# Altium PCB 八进八出.PcbDoc
Units mm, origin at the board's own origin, x right, y up, seen from the top; angles counter-clockwise.
Board outline 122.4 x 87.4 mm, 2 copper layers (Top Layer, Bottom Layer); 150 components, 165 nets, 519 pads, 53 vias.
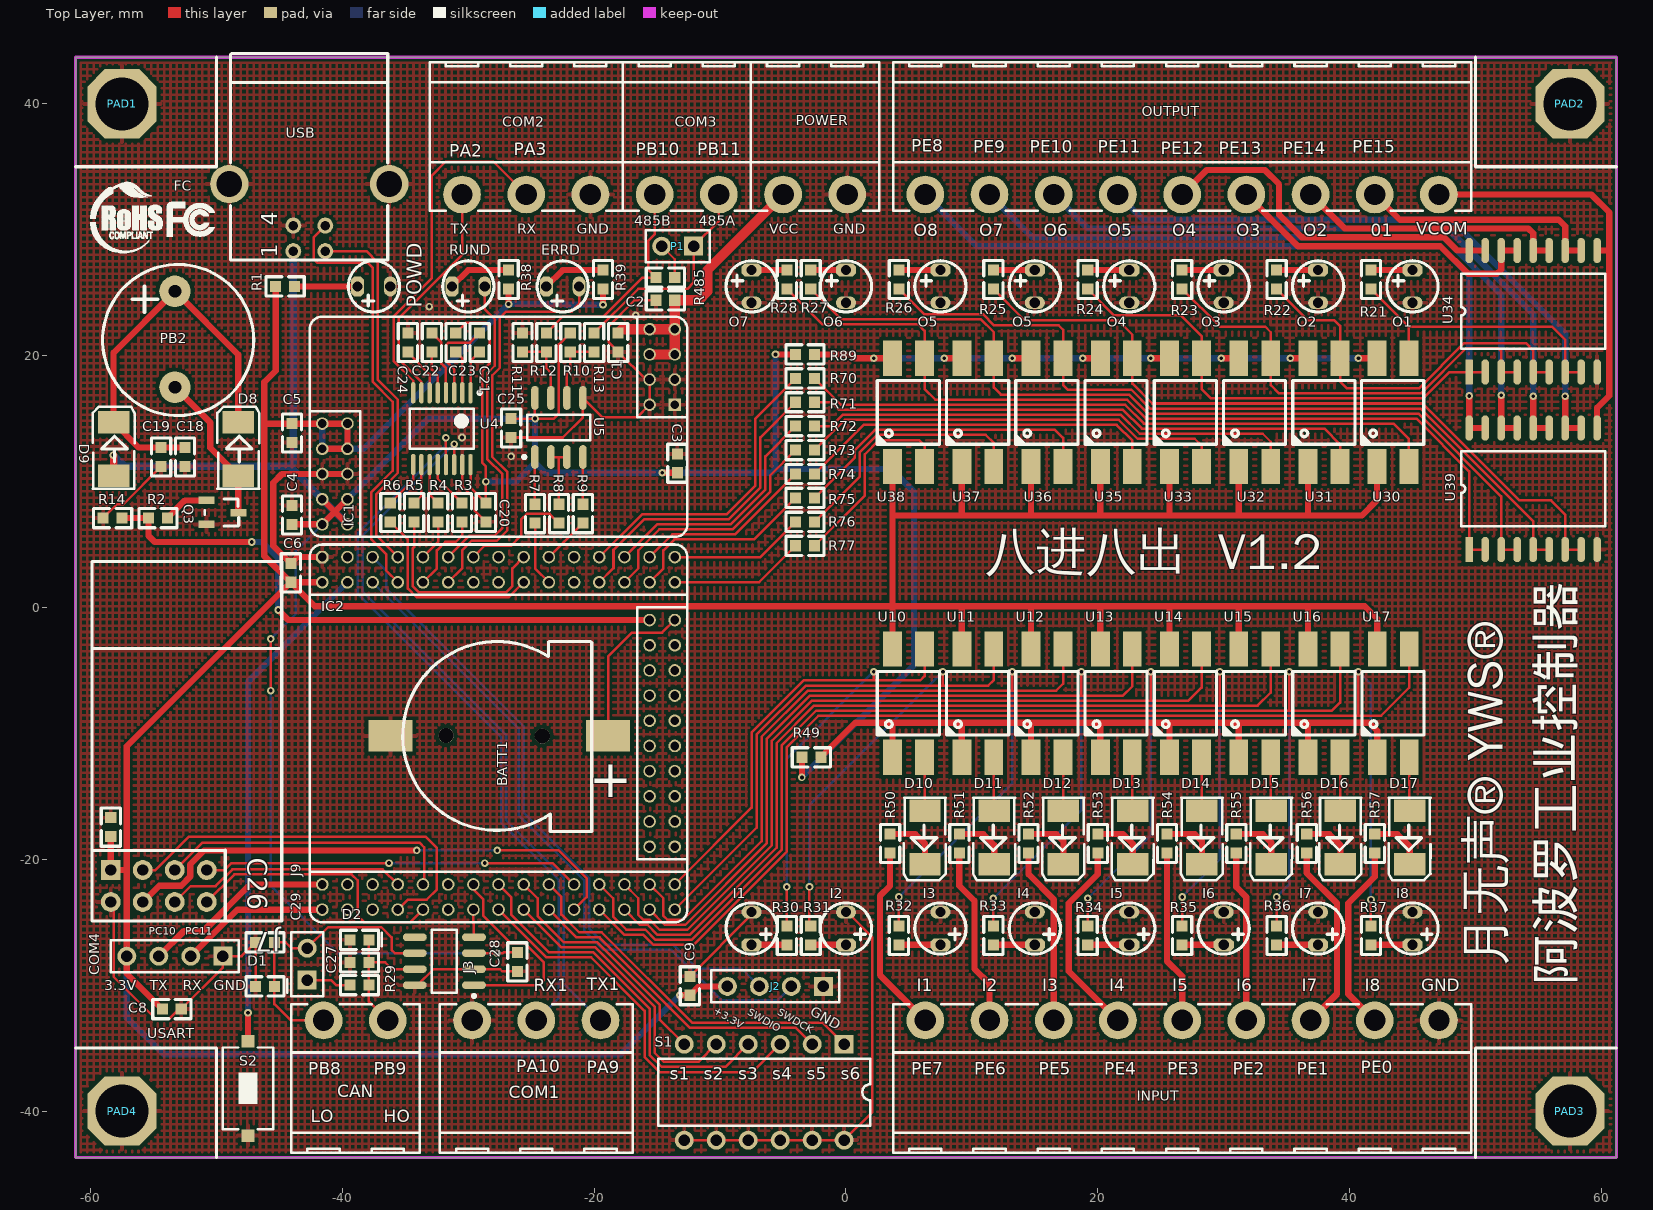
[diagram p0: Top Layer view]
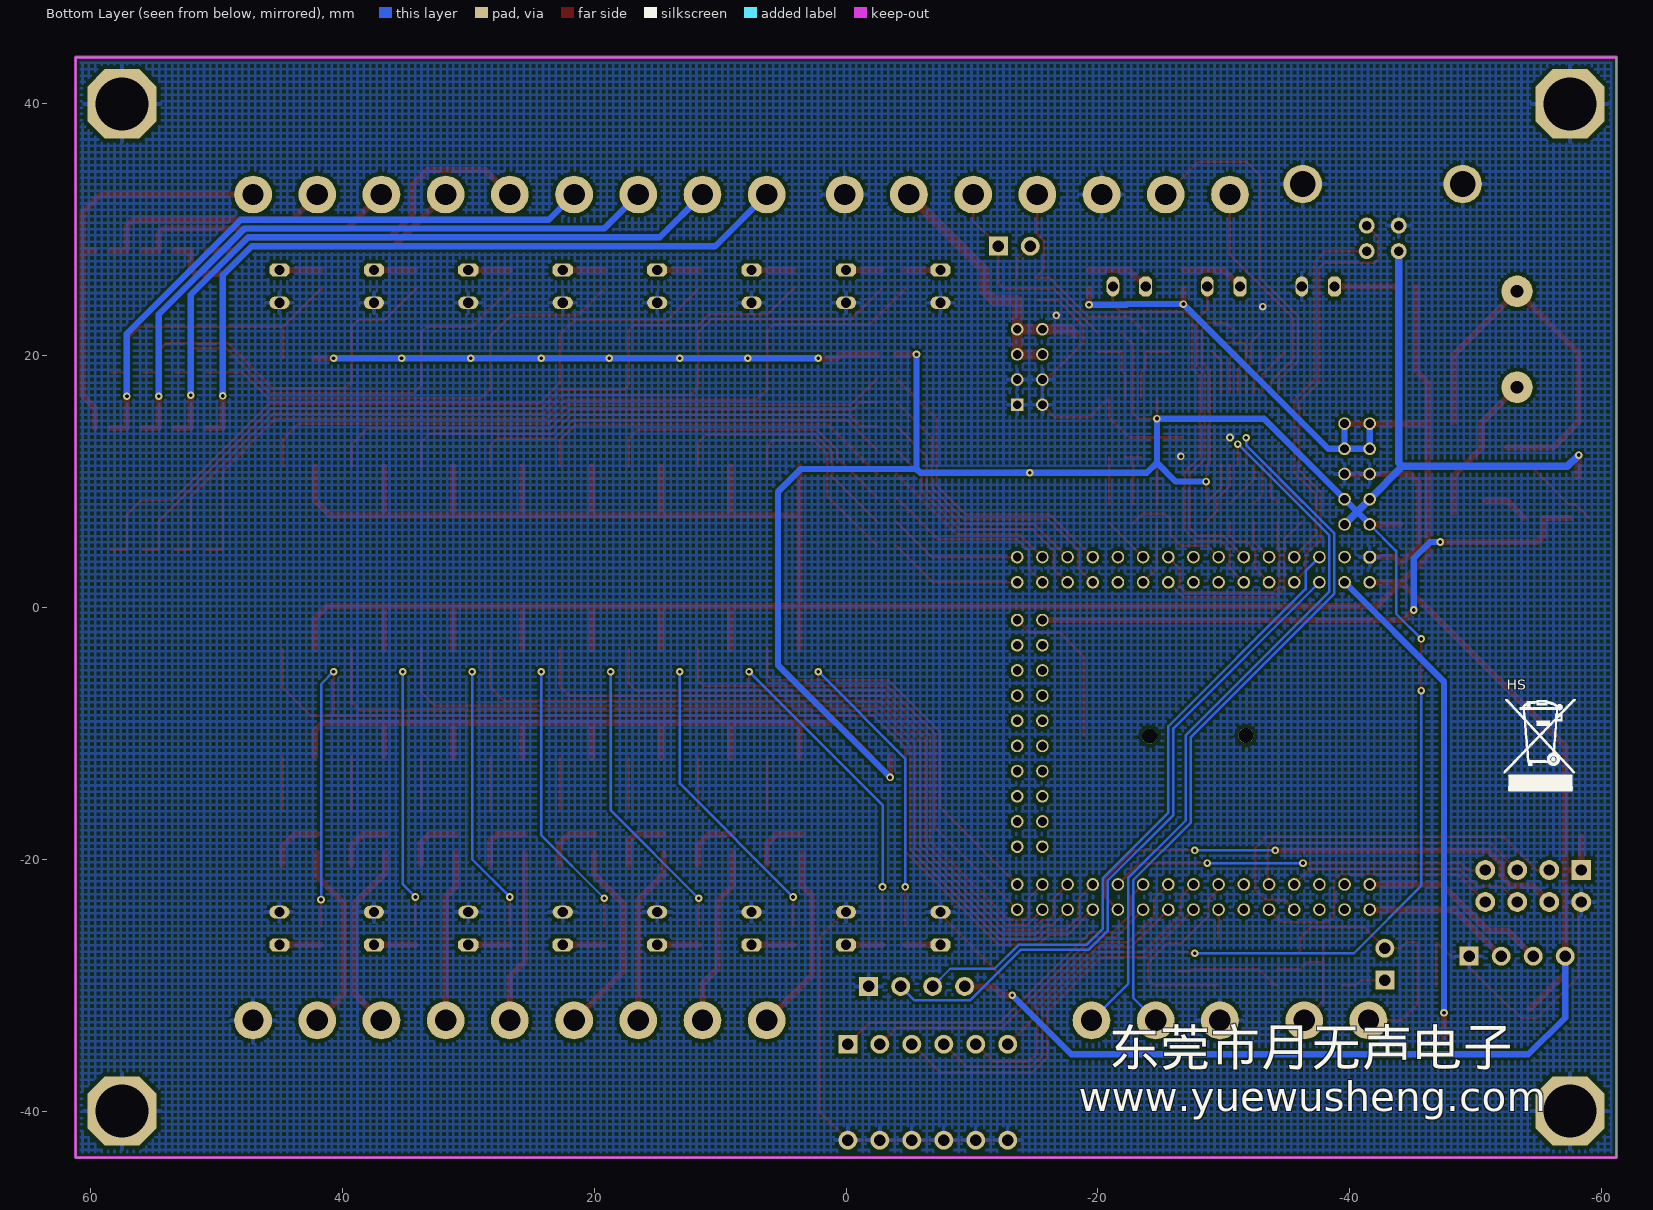
[diagram p1: Bottom Layer view, seen from below]

## Layer stack, top to bottom
Top Layer: signal copper 0.0356
Dielectric: dielectric 0.32, FR-4, Dk 4.8
Bottom Layer: signal copper 0.0356

## Board outline
-61.2,-43.7 61.2,-43.7 61.2,43.7 -61.2,43.7

## Design rules (kind name [scope] priority, off if disabled: settings)
Clearance [(InPadClass('All Pads')) vs InPolygon] p1: gap=0.3
Clearance Clearance_1 [All] p2: gap=0.2
ComponentClearance [All] p1 off: gap=0.254 collisioncheckmode=3 verticalgap=0.254 showdistances=FALSE
PlaneConnect [All] p1: planeconnectstyle=Relief reliefexpansion=0 reliefentries=4 reliefconductorwidth=0.3 reliefairgap=0.508
PolygonConnect PolygonConnect_1 [All vs IsComponentPad] p1: connectstyle=Relief reliefconductorwidth=0.3 reliefentries=4 polygonreliefangle="90 Angle" airgapwidth=0.3
PolygonConnect [All] p2: connectstyle=Direct reliefconductorwidth=0.3 reliefentries=4 polygonreliefangle="90 Angle" airgapwidth=0.3
RoomDefinition 公共电路 [InComponentClass('公共电路')] p1: confinementstyle=ConfineIn formatcopy=TRUE lockcomponents=FALSE outline -62,-49.2 3.5,-49.2 3.5,-43.7 61.2,-43.7 61.2,43.7 50,43.7 50,35 61.2,35 61.2,-35 50,-35 50,-43.7 3.5,-43.7 3.5,-28.5 -10.5,-28.5 -10.5,28.5 3.5,28.5 3.5,44.5 -62,44.5
RoomDefinition 八进八出 [InComponentClass('八进八出')] p2: confinementstyle=ConfineIn formatcopy=TRUE lockcomponents=FALSE outline -10,28 3.5,28 3.5,46.6 62,46.6 62,-46.8 3.5,-46.8 3.5,-28 -10,-28
RoutingVias [All] p1: holewidth=0.3 width=0.6 viastyle="Through Hole" minholewidth=0.3 minwidth=0.6 maxholewidth=0.3 maxwidth=0.6
SolderMaskExpansion [All] p1: expansion=0.102
Width [All] p1: maxlimit=2 minlimit=0.16 preferedwidth=0.2 minimp=50.000000 maximp=50.000000 favimp=50.000000
26 further rules are at their usual default settings.

## Classes and differential pairs
component class 公共电路: BATT1 C1 C2 C3 C4 C5 C6 C8 C9 C18 C19 C20 C21 C22 C23 C24 C25 C26 C27 C28 C29 CAN COM1 COM2 COM3 COM4 D1 D2 D8 D9 ERRD FC HS IC1 J2 J3 J9 P1 PAD1 PAD2 PAD3 PAD4 PB2 POWD POWER Q3 R1 R2 R3 R4 R5 R6 R7 R8 R9 R10 R11 R12 R13 R14 R29 R38 R39 R485 RUND S1 S2 U4 U5 usb1
component class 八进八出: D10 D11 D12 D13 D14 D15 D16 D17 I1 I2 I3 I4 I5 I6 I7 I8 INPUT O1 O2 O3 O4 O5 O6 O7 OUTPUT R21 R22 R23 R24 R25 R26 R27 R28 R30 R31 R32 R33 R34 R35 R36 R37 R49 R50 R51 R52 R53 R54 R55 R56 R57 R70 R71 R72 R73 R74 R75 R76 R77 R89 U10 U11 U12 U13 U14 U15 U16 U17 U30 U31 U32 U33 U34 U35 U36 U37 U38 U39

## Components (designator, comment, footprint, x,y, rotation, side; value= is the part's Value field where it differs from the comment)
BATT1 "" MINI-BAT -18.9,-10.2 r180 top
C1 "104" 0603A -18.1,21.8 r270 top
C2 "104" 0603A -13.6,24.4 r180 top
C3 "104" 0603A -13.4,10.7 r90 top
C4 "104" 0603A -44,6.6 r90 top
C5 "104" 0603A -44,14.6 r270 top
C6 "104" 0603A -44.1,2 r90 top
C8 "104" 0603A -54.3,-31.9 r0 top
C9 "104" 0603A -12.4,-30.8 r90 top
C18 "104" 0603A -52.5,12.7 r270 top
C19 "104" 0603A -54.4,12.7 r270 top
C20 "104" 0603A -28.6,8.3 r270 top
C21 "104" 0603A -29.1,20.3 r90 top
C22 "104" 0603A -32.9,20.3 r90 top
C23 "104" 0603A -31,20.3 r90 top
C24 "104" 0603A -34.8,20.3 r90 top
C25 "104" 0603A -26.6,13.5 r90 top
C26 "104" 0603A -58.4,-16.7 r270 top
C27 "104" 0603A -37.9,-28.2 r180 top
C28 "104" 0603A -26.1,-28.9 r90 top
C29 "102" 0603A -46.9,-26.6 r0 top
CAN "CON2" CON2-5.1卧 -41.5,-32.8 r180 top (schematic designator J8)
COM1 "TJA1050" SO8_L -31.9,-28.1 r180 top (schematic designator U6)
COM2 "CON3" CON3-5.1卧 -20.3,32.8 r0 top (schematic designator J5)
COM3 "CON2" CON2-5.1卧 -10.1,32.8 r0 top (schematic designator J4)
COM4 "USART" HDR1X4 -49.5,-27.7 r180 top (schematic designator J6)
D1 "RB521S" 0603D -46.9,-30.1 r0 top
D2 "RB521S" 0603D -39.4,-26.4 r0 top
D8 "RB521S" 贴片二极管 -48.2,16 r90 top
D9 "RB521S" 贴片二极管 -58.1,16 r90 top
D10 "4148" 贴片二极管 6.2,-21.7 r270 top
D11 "4148" 贴片二极管 11.7,-21.7 r270 top
D12 "4148" 贴片二极管 17.2,-21.7 r270 top
D13 "4148" 贴片二极管 22.7,-21.7 r270 top
D14 "4148" 贴片二极管 28.2,-21.7 r270 top
D15 "4148" 贴片二极管 33.7,-21.7 r270 top
D16 "4148" 贴片二极管 39.2,-21.7 r270 top
D17 "4148" 贴片二极管 44.7,-21.7 r270 top
ERRD "LED" LED2.5 -22.5,25.5 r180 top (schematic designator LED3)
FC "" fc -54.5,30.8 r0 top
HS "" HS -55.1,-10.2 r180 bottom
I1 "LED" LED2.5 -7.5,-25.5 r270 top (schematic designator LED18)
I2 "LED" LED2.5 0,-25.5 r270 top (schematic designator LED11)
I3 "LED" LED2.5 7.5,-25.5 r270 top (schematic designator LED12)
I4 "LED" LED2.5 15,-25.5 r270 top (schematic designator LED13)
I5 "LED" LED2.5 22.5,-25.5 r270 top (schematic designator LED14)
I6 "LED" LED2.5 30,-25.5 r270 top (schematic designator LED15)
I7 "LED" LED2.5 37.5,-25.5 r270 top (schematic designator LED16)
I8 "LED" LED2.5 45,-25.5 r270 top (schematic designator LED17)
IC1 "电源板" 电源板 -41.6,6.6 r180 top
IC2 "物联网核心板" 核心板-物联网1 -41.6,4 r180 top
INPUT "CON9" CON9-5.1卧 6.3,-32.8 r180 top (schematic designator J10)
J2 "CON4" HDR1X4 -1.8,-30.1 r180 top
J3 "CON3" CON3-5.1卧 -29.7,-32.8 r180 top
J7 "NRF2401模块" NRF24L01 -58.4,-23.4 r270 top
J9 "" HDR1X2 -42.8,-29.6 r90 top
O1 "LED" LED2.5 45,25.5 r90 top (schematic designator LED30)
O2 "LED" LED2.5 37.5,25.5 r90 top (schematic designator LED31)
O3 "LED" LED2.5 30,25.5 r90 top (schematic designator LED32)
O4 "LED" LED2.5 22.5,25.5 r90 top (schematic designator LED33)
O5 "LED" LED2.5 7.5,25.5 r90 top (schematic designator LED35)
O5 "LED" LED2.5 15,25.5 r90 top (schematic designator LED34)
O6 "LED" LED2.5 0,25.5 r90 top (schematic designator LED36)
O7 "LED" LED2.5 -7.5,25.5 r90 top (schematic designator LED37)
OUTPUT "CON9" CON9-5.1卧 47.1,32.8 r0 top (schematic designator J11)
P1 "" HDR1X2 -12.1,28.7 r180 top
PAD1 "PAD" PAD -57.5,40 r0 top
PAD2 "PAD" PAD 57.5,40 r0 top
PAD3 "PAD" PAD 57.5,-40 r0 top
PAD4 "PAD" PAD -57.5,-40 r0 top
PB2 "蜂鸣器" 蜂鸣器 -53.3,21.3 r90 top (schematic designator U3)
POWD "LED" LED2.5 -37.5,25.5 r180 top (schematic designator LED1)
POWER "CON2" CON2-5.1卧 0.1,32.8 r0 top (schematic designator J1)
Q3 "9013" SOT23 -50.8,8.5 r270 top
R1 "300" 0603A -45.3,25.5 r0 top
R2 "1K" 0603A -55.4,7.1 r0 top
R3 "33" 0603A -30.5,6.8 r90 top
R4 "33" 0603A -32.4,6.8 r90 top
R5 "33" 0603A -34.3,6.8 r90 top
R6 "33" 0603A -36.2,6.8 r90 top
R7 "33" 0603A -24.7,6.7 r90 top
R8 "33" 0603A -22.8,6.7 r90 top
R9 "33" 0603A -20.9,6.7 r90 top
R10 "100K" 0603A -21.9,20.3 r90 top
R11 "100K" 0603A -25.7,20.3 r90 top
R12 "33" 0603A -23.8,20.3 r90 top
R13 "33" 0603A -20,20.3 r90 top
R14 "103" 0603A -59,7.1 r0 top
R21 "560" 0603A 41.7,25.3 r90 top
R22 "560" 0603A 34.2,25.3 r90 top
R23 "560" 0603A 26.7,25.3 r90 top
R24 "560" 0603A 19.2,25.3 r90 top
R25 "560" 0603A 11.7,25.3 r90 top
R26 "560" 0603A 4.2,25.3 r90 top
R27 "560" 0603A -2.8,25.3 r90 top
R28 "560" 0603A -4.7,25.3 r90 top
R29 "60" 0603A -37.9,-30 r180 top
R30 "160" 0603A -4.7,-25.3 r270 top
R31 "160" 0603A -2.8,-25.3 r270 top
R32 "160" 0603A 4.2,-25.3 r270 top
R33 "160" 0603A 11.7,-25.3 r270 top
R34 "160" 0603A 19.2,-25.3 r270 top
R35 "160" 0603A 26.7,-25.3 r270 top
R36 "160" 0603A 34.2,-25.3 r270 top
R37 "160" 0603A 41.7,-25.3 r270 top
R38 "160" 0603A -26.8,25.3 r90 top
R39 "160" 0603A -19.3,25.3 r90 top
R49 "0" 0603A -2,-11.9 r180 top
R50 "160" 0603A 3.5,-18 r270 top
R51 "160" 0603A 9,-18 r270 top
R52 "160" 0603A 14.5,-18 r270 top
R53 "160" 0603A 20,-18 r270 top
R54 "160" 0603A 25.5,-18 r270 top
R55 "160" 0603A 31,-18 r270 top
R56 "160" 0603A 36.6,-18 r270 top
R57 "160" 0603A 42,-18 r270 top
R70 "51" 0603A -4,18.2 r0 top
R71 "51" 0603A -4,16.3 r0 top
R72 "51" 0603A -4,14.4 r0 top
R73 "51" 0603A -4,12.5 r0 top
R74 "51" 0603A -4,10.6 r0 top
R75 "51" 0603A -4,8.7 r0 top
R76 "51" 0603A -4,6.8 r0 top
R77 "51" 0603A -4,4.9 r0 top
R89 "0" 0603A -2.5,20.1 r180 top
R485 "120" 0603A -13.6,26.2 r180 top
RUND "LED" LED2.5 -30,25.5 r180 top (schematic designator LED2)
S1 "SW DIP-6" DIP-12/SW -6.5,-38.5 r180 top
S2 "RESRT" SW-PB2 -47.5,-38.2 r270 top
U4 "SP3232" TSSOP16 -32.1,14.2 r270 top
U5 "SP485" SO8_L -22.8,14.3 r90 top
U10 "TLP521" PC817 3.7,-11.6 r90 top
U11 "TLP521" PC817 9.2,-11.6 r90 top
U12 "TLP521" PC817 14.7,-11.6 r90 top
U13 "TLP521" PC817 20.2,-11.6 r90 top
U14 "TLP521" PC817 25.7,-11.6 r90 top
U15 "TLP521" PC817 31.2,-11.6 r90 top
U16 "TLP521" PC817 36.7,-11.6 r90 top
U17 "TLP521" PC817 42.2,-11.6 r90 top
U30 "TLP521" PC817 42.175,11.5 r90 top
U31 "TLP521" PC817 36.7,11.5 r90 top
U32 "TLP521" PC817 31.2,11.5 r90 top
U33 "TLP521" PC817 25.7,11.5 r90 top
U34 "ULN2803" SOL18 49.5,18.7 r90 top
U35 "TLP521" PC817 20.2,11.5 r90 top
U36 "TLP521" PC817 14.7,11.5 r90 top
U37 "TLP521" PC817 9.2,11.5 r90 top
U38 "TLP521" PC817 3.7,11.5 r90 top
U39 "ULN2803" SOL18 49.5,4.6 r90 top
USB "USB" USB-B3 -43.9,28.3 r90 top

## Footprints (in the part's own frame and the unit in brackets; to place one, negate y for a bottom-side part, rotate by r counter-clockwise, add the part's x,y. Pads: shape width x height; smd on the part's side, far side on the other; paste and mask are expansions set on the pad)
0603A [mm]
  rect 0.88x0.88 smd: 1(0,0) 2(1.5,0)
  silkscreen extent -0.76,-0.76 2.26,0.76
0603D [mm]
  rect 0.88x0.88 smd: A(0,0) K(1.5,0)
  silkscreen extent -0.76,-0.76 2.52,0.76, body extent 0,-0.54 1.5,0.54, height 1.45
CON2-5.1卧 [mm]
  round 3 hole 1.7: 1(0,0) 2(-5.1,0)
  silkscreen extent -7.65,-1.28 2.55,10.5
CON3-5.1卧 [mm]
  round 3 hole 1.7: 1(0,0) 2(-5.1,0) 3(-10.2,0)
  silkscreen extent -12.75,-1.28 2.55,10.5
CON9-5.1卧 [mm]
  round 3 hole 1.7: 1(0,0) 2(-5.1,0) 3(-10.2,0) 4(-15.3,0) 5(-20.4,0) 6(-25.5,0) 7(-30.6,0) 8(-35.7,0) 9(-40.8,0)
  silkscreen extent -43.35,-1.28 2.55,10.5
DIP-12/SW [mm] "DIP Switch; 12 Leads"
  rect 1.5x1.5 hole 0.9: 1(-6.35,-3.81)
  round 1.5 hole 0.9: 2(-3.81,-3.81) 3(-1.27,-3.81) 4(1.27,-3.81) 5(3.81,-3.81) 6(6.35,-3.81) 7(6.35,3.81) 8(3.81,3.81) 9(1.27,3.81) 10(-1.27,3.81) 11(-3.81,3.81) 12(-6.35,3.81)
  silkscreen extent -8.43,-2.65 8.41,2.65
fc [mm]
  silkscreen extent -5.53,-2.62 4.36,3
HDR1X2 [mm] "Connector; Header; 2 Position"
  rect 1.5x1.5 hole 0.9: 1(0,0)
  round 1.5 hole 0.9: 2(2.54,0)
  silkscreen extent -1.27,-1.27 3.81,1.27
HDR1X4 [mm] "Connector; Header; 4 Position"
  rect 1.5x1.5 hole 0.9: 1(0,0)
  round 1.5 hole 0.9: 2(2.54,0) 3(5.08,0) 4(7.62,0)
  silkscreen extent -1.27,-1.27 8.89,1.27
HS [mm]
  silkscreen extent -2.87,-4.39 2.87,2.87
LED2.5 [mil]
  oct 40x63 hole 32: A(51.18,0)
  oval 40x63 hole 32: K(-51.18,0)
  silkscreen extent -80,-80 80,80
MINI-BAT [mm]
  round 1.2 hole 1.2: 0(5.226,0.017) 0(12.863,-0.02)
  rect 3.5x2.5 smd: 1(-0.01,0.007) 2(17.29,0.007)
  silkscreen extent 1.29,-7.49 16.31,7.61
NRF24L01 [mil]
  round 62 hole 35: 1(0,0) 3(0,100) 4(-100,100) 5(0,200) 6(-100,200) 7(0,300) 8(-100,300)
  rect 62x62 hole 35: 2(-100,0)
  silkscreen extent -1065,-59 59,535
PAD [mm]
  oct 5.5x5.5 hole 4.2: 1(0,0)
PC817 [mm]
  rect 2.8x1.5 smd: 1(-0.3,0) 2(-0.3,-2.54) 3(8.3,-2.54) 4(8.3,0)
  silkscreen extent 1.46,-3.72 6.53,1.22
SO8_L [mm] "SOIC, 8-Leads, Body 4.9x3.9mm, Pitch 1.27mm, IPC High Density"
  oval 1.9x0.6 smd: 1(-2.35,1.905) 2(-2.35,0.635) 3(-2.35,-0.635) 4(-2.35,-1.905) 5(2.35,-1.905) 6(2.35,-0.635) 7(2.35,0.635) 8(2.35,1.905)
  silkscreen extent -2.48,-2.5 1,2.88, body extent -2,-2.5 2,2.5, height 1.75
SOL18 [mm]
  rect 2x0.6 smd: 1(0,0)
  oval 2x0.6 smd: 2(0,-1.27) 3(0,-2.54) 4(0,-3.81) 5(0,-5.08) 6(0,-6.35) 7(0,-7.62) 8(0,-8.89) 9(0,-10.16) 10(9.65,-10.16) 11(9.65,-8.89) 12(9.65,-7.62) 13(9.65,-6.35) 14(9.65,-5.08) 15(9.65,-3.81) 16(9.65,-2.54) 17(9.65,-1.27) 18(9.65,0)
  silkscreen extent 1.84,-10.79 7.82,0.64
SOT23 [mm]
  rect 0.6x1.27 smd: 1(0,0) 2(1.905,0) 3(0.965,2.54)
  silkscreen extent -0.11,-0.13 2.04,2.56, body extent -0.5,0.43 2.42,2.15, height 1.5
SW-PB2 [mm]
  rect 1x1 smd: 1(-3.75,0) 2(3.75,0)
  silkscreen extent -3.25,-2 3.25,2
TSSOP16 [mm] "TSOP, 16-Leads, Body 5x4.4mm, Pitch 0.65mm, IPC Medium Density"
  oval 1.7x0.35 smd: 1(-2.85,2.275) 2(-2.85,1.625) 3(-2.85,0.975) 4(-2.85,0.325) 5(-2.85,-0.325) 6(-2.85,-0.975) 7(-2.85,-1.625) 8(-2.85,-2.275) 9(2.85,-2.275) 10(2.85,-1.625) 11(2.85,-0.975) 12(2.85,-0.325) 13(2.85,0.325) 14(2.85,0.975) 15(2.85,1.625) 16(2.85,2.275)
  silkscreen extent -2.97,-2.55 1.6,3.13, body extent -2.25,-2.55 2.25,2.55, height 1.1
USB-B3 [mil]
  round 50 hole 30: 1(0,0) 2(0,-100) 3(80,-100) 4(80,0)
  round 120 hole 80: 5(210,200) 6(210,-300)
  silkscreen extent -28,-295 618,197
核心板-物联网1 [mm]
  oct 1x1 hole 0.7: 1(0,0)
  round 1 hole 0.7: 2(0,2) 3(-2,0) 4(-2,2) 5(-4,0) 6(-4,2) 7(-6,0) 8(-6,2) 9(-8,0) 10(-8,2) 11(-10,0) 12(-10,2) 13(-12,0) 14(-12,2) 15(-14,0) 16(-14,2) 17(-16,0) 18(-16,2) 19(-18,0) 20(-18,2) 21(-20,0) 22(-20,2) 23(-22,0) 24(-22,2) 25(-24,0) 26(-24,2) 27(-26,0) 28(-26,2) 29(-28,0) 30(-28,2) 31(-26,5) 32(-28,5) 33(-26,7) 34(-28,7) 35(-26,9) 36(-28,9) 37(-26,11) 38(-28,11) 39(-26,13) 40(-28,13) 41(-26,15) 42(-28,15) 43(-26,17) 44(-28,17) 45(-26,19) 46(-28,19) 47(-26,21) 48(-28,21) 49(-26,23) 50(-28,23) 51(-28,26) 52(-28,28) 53(-26,26) 54(-26,28) 55(-24,26) 56(-24,28) 57(-22,26) 58(-22,28) 59(-20,26) 60(-20,28) 61(-18,26) 62(-18,28) 63(-16,26) 64(-16,28) 65(-14,26) 66(-14,28) 67(-12,26) 68(-12,28) 69(-10,26) 70(-10,28) 71(-8,26) 72(-8,28) 73(-6,26) 74(-6,28) 75(-4,26) 76(-4,28) 77(-2,26) 78(-2,28) 79(0,26) 80(0,28)
  silkscreen extent -29,-1 1,29
电源板 [mm]
  round 1 hole 0.7: 1(-2,0) 1(-2,-2) 1(0,0) 1(0,-2) 2(-2,-4) 2(0,-4) 3(-2,-6) 3(-2,-8) 3(0,-6) 3(0,-8) 4(-28,-11.5) 4(-26,-11.5) 4(-26,-9.5) 6(-28,-15.5) 6(-28,-13.5) 6(-26,-15.5) 6(-26,-13.5)
  rect 1x1 hole 0.7: 5(-28,-9.5)
  silkscreen extent -29,-16.5 1,1
蜂鸣器 [mm]
  round 2.5 hole 1: 1(3.81,0) 2(-3.81,0)
  silkscreen extent -6.06,-6.25 5.94,5.75
贴片二极管 [mm]
  rect 1.8x2.5 smd: A(-5.55,0.075) K(-1.3,0.075)
  silkscreen extent -6.58,-1.61 -0.05,1.73

## Part data
BATT1: library part Battery, "XH414H"
C1 C2 C3 C4 C5 C6 C8 C9 C18 C19 C20 C21 C22 C23 C24 C25 C26 C27 C28 C29: library part CAP, "Capacitor"
COM4: library part "Header 4", "Header, 4-Pin"
D1 D2 D8 D9 D10 D11 D12 D13 D14 D15 D16 D17: library part 二极管
FC HS: library part PAD
J9 P1: library part "Header 2", "Header, 2-Pin"
Q3: library part NPN
R1 R2 R3 R4 R5 R6 R7 R8 R9 R10 R11 R12 R13 R14 R29 R38 R39 R485: library part RES2
R21 R22 R23 R24 R25 R26 R27 R28 R30 R31 R32 R33 R34 R35 R36 R37 R49 R50 R51 R52 R53 R54 R55 R56 R57 R70 R71 R72 R73 R74 R75 R76 R77 R89: library part Res2, "Resistor"
S1: "DIP Switch, 6 Position, SPST"
S2: library part SW-PB
U4: library part SP3232EEA
U10 U11 U12 U13 U14 U15 U16 U17 U30 U31 U32 U33 U35 U36 U37 U38: library part TLP521-1, "Single NPN PhotoTransistor OptoCoupler."
USB: library part "HEADER 3X2"

## Via types
v1: diameter 0.6, hole 0.3, Top Layer to Bottom Layer, 52 vias
v2: diameter 0.6, hole 0.3, Top Layer to Bottom Layer, tented both sides, 1 vias

## Nets (pads, with @x,y where several pads share a name; then routed paths per layer and width w, separated by ;. In a path a pad name is that pad's centre, name@x,y a point inside that pad or via, vN(x,y) a via of type N, cw(c..) or ccw(c..) an arc to the next point about the centre after c; other vN are vias at no path point)
485A: COM3.1 P1.1 R13.2 | length 17.4
  Top Layer w0.2: R13.2 -16.5,25.3 -12.6,25.3 -12.1,25.8 P1.1 -10.1,30.7 COM3.1
485B: COM3.2 R12.2 R485.2 | length 17.6
  Top Layer w0.2: R12.2 -22.5,23.1 -19.266,23.1 -16.166,26.2 R485.2 -15.69,26.79 -15.69,29.135 -15.2,29.625 COM3.2
+3.3V: C5.1 C6.1 C8.1 C9.1 C26.2 COM4.4 IC1.3 IC2.2 J2.4 J7.2 R1.1 R38.1 R39.1 U10.4 U11.4 U12.4 U13.4 U14.4 U15.4 U16.4 U17.4 U30.1 U31.1 U32.1 U33.1 U35.1 U36.1 U37.1 U38.1 | length 361.7
  Top Layer w0.5: C26.2 J7.2 -57.16,-20.86 -57.12,-20.9 ; C8.1 -57.12,-29.08 COM4.4 -57.12,-20.9 ; R1.1 -45.3,18.8 -46.2,17.9 -46.2,14.6 ; IC2.2 C6.1 ; IC1.3@-41.6,12.6 -39.6,12.6 -39.6,14.6 -41.6,14.6 C5.1 -46.2,14.6 ; v1(-26.8,24.1) R38.1 ; v1(-19.3,24.05) R39.1 ; v1(-13.2,-30.8) C9.1 -12.384,-30.8 -11.684,-30.1 J2.4 ; U10.4 3.7,0.1 ; U38.1 3.7,7.3 ; U11.4 9.2,0.1 ; U37.1 9.2,7.3 ; U12.4 14.7,0.1 ; U36.1 14.7,7.3 ; U13.4 20.2,0.1 ; U35.1 20.2,7.3 ; U14.4 25.7,0.1 ; U33.1 25.7,7.3 ; U15.4 31.2,0.1 ; U32.1 31.2,7.3 ; U16.4 36.7,0.1 ; U31.1 36.7,7.3 ; U30.1 42.175,8.5 40.975,7.3 36.7,7.3 ; U17.4 42.2,-0.9 41.2,0.1 36.7,0.1 ; -57.12,-20.9 -57.12,-11.02 C6.1 ; -46.2,14.6 -46.2,4.084 -44.116,2 C6.1 ; C6.1 -42.2,0.1 3.7,0.1 ; 3.7,0.1 9.2,0.1 ; 3.7,0.1 3.7,7.3 ; 3.7,7.3 9.2,7.3 ; 9.2,0.1 14.7,0.1 ; 9.2,7.3 14.7,7.3 ; 14.7,0.1 20.2,0.1 ; 14.7,7.3 20.2,7.3 ; 20.2,0.1 25.7,0.1 ; 20.2,7.3 25.7,7.3 ; 25.7,0.1 31.2,0.1 ; 25.7,7.3 31.2,7.3 ; 31.2,0.1 36.7,0.1 ; 31.2,7.3 36.7,7.3
  Bottom Layer w0.5: COM4.4 -57.12,-32.58 -54.2,-35.5 -17.9,-35.5 v1(-13.2,-30.8) ; IC1.3@-41.6,14.6 -41.6,12.6 IC1.3@-39.6,12.6 ; IC1.3@-39.6,14.6 IC1.3@-39.6,12.6 ; v1(-19.3,24.05) -22.25,24.05 -22.3,24.1 v1(-26.8,24.1) -38.3,12.6 IC1.3@-39.6,12.6
+5V: C3.1 C4.1 C20.1 C23.2 C25.2 C28.2 COM1.3 D9.A IC1.1 R10.2 R49.2 R89.2 U4.16 U5.8 USB.1 | length 234.9
  Top Layer w0.2: v1(-45.7,-6.6) v1(-45.7,-2.5) ; C23.2 -30.2,22.6 -28.596,22.6 -28.36,22.364 -28.36,22.16 -28.3,22.1 -28.3,19.366 -28.9,18.766 -28.9,11.5 -28.6,11.2 v1(-28.6,10) C20.1 -29.825,9.525 U4.16 ; COM1.3 v1(-27.7,-27.465) -27.265,-27.465 -27.2,-27.4 C28.2 ; C25.2 v1@-24.705,15 ; U5.8 v1@-24.705,15 ; R10.2 -22.8,20.9 -22.8,15.4 -23.2,15 v1(-24.7,15) v1@-24.705,15
  Top Layer w0.5: C4.1 -41.6,6.6 -40.6,7.6 ; IC1.1@-41.4,8.6 -41.4,8.4 -40.6,7.6 ; IC1.1@-39.6,6.6 -40.6,7.6 ; IC1.1@-39.6,8.6 -40.6,7.6 ; v1(-14.6,10.7) C3.1 ; v1(-5.6,20.1) R89.2 ; v1(-3.5,-13.5) R49.2
  Top Layer w0.6: v1(-58.2,12.1) -58.175,12.075 D9.A
  Bottom Layer w0.2: v1(-45.7,-6.6) -45.7,-22.1 -40.335,-27.465 v1(-27.7,-27.465) ; v1(-45.7,-2.5) -43.7,-0.5 -43.7,4.5 IC1.1@-41.6,6.6
  Bottom Layer w0.5: IC1.1@-41.6,6.6 -40.6,7.6 -39.6,8.6 -33.2,15 v1(-24.7,15) -24.7,11.5 ; v1(-28.6,10) -26.2,10 -24.7,11.5 ; v1(-5.6,20.1) -5.6,11 ; v1(-3.5,-13.5) 5.4,-4.6 5.4,9.2 3.6,11 -5.6,11 ; -24.7,11.5 -23.9,10.7 v1(-14.6,10.7) -5.9,10.7 -5.6,11
  Bottom Layer w0.6: v1(-58.2,12.1) -57.3,11.2 -44.2,11.2 ; USB.1 -43.9,11.5 -44.2,11.2 ; IC1.1@-39.6,6.6 -40.6,7.6 -41.6,8.6 -44.2,11.2
ADC1: IC2.33
ADC2: IC2.34
ADC3: IC2.35
ADC4: IC2.36
ADC5: IC2.48
ADC6: IC2.47
ADC7: IC2.50
ADC8: IC2.49
BEEP: IC2.31 R2.1 R14.2 | length 48.5
  Top Layer w0.5: R14.2 R2.1 -55.4,5.7 -54.9,5.2 v1(-47.2,5.2) ; v1(-45.1,-0.2) -44.3,-1 IC2.31
  Bottom Layer w0.5: v1(-47.2,5.2) -46.4,5.2 -45.1,3.9 v1(-45.1,-0.2)
BOOT: IC2.3
CAN_HO: C27.1 CAN.2 COM1.7 D2.K R29.1 | length 10.9
  Top Layer w0.2: D2.K C27.1 ; CAN.2 -37.9,-31.3 R29.1 C27.1 ; COM1.7 -36.065,-28.735 -36.6,-28.2 C27.1
CAN_LO: C29.2 CAN.1 COM1.6 D1.K J9.2 | length 22.8
  Top Layer w0.2: CAN.1 -44.1,-32.8 -45.4,-31.5 D1.K C29.2 -44.5,-26.6 -44.04,-27.06 J9.2 -41.14,-25.4 -36.9,-25.4 -36.1,-26.2 -36.1,-27.2 -35.835,-27.465 COM1.6
CAN_RX: COM1.4 IC2.68 | length 2.2
  Top Layer w0.2: IC2.68 -29.6,-25.1 -29.55,-25.15 COM1.4
CAN_TX: COM1.1 IC2.67 | length 16.3
  Top Layer w0.2: IC2.67 -29.6,-22.4 -28.8,-23.2 -28.8,-24.5 -26.64,-26.66 -25.536,-26.66 -23.996,-28.2 -23.996,-29.596 -24.405,-30.005 COM1.1
DAC1: IC2.39
DAC2: IC2.40
ERR_LED: ERRD.K IC2.12 | length 33
  Top Layer w0.2: IC2.12 -30.5,3.1 -30.5,4.534 -29.734,5.3 -27.734,5.3 -26.9,6.134 -26.9,10.766 -28.1,11.966 -28.1,18.434 -27.5,19.034 -27.5,23 -27,23.5 -21.8,23.5 -21.2,24.1 ERRD.K
GND: BATT1.2 C1.2 C2.2 C3.2 C4.2 C5.2 C6.2 C8.2 C9.2 C18.2 C19.2 C20.2 C24.2 C25.1 C26.1 C27.2 C28.1 C29.1 COM1.2 COM1.8 COM2.1 COM4.1 D1.A D2.A I1.K I2.K I3.K I4.K I5.K I6.K I7.K I8.K IC1.2 IC1.4 IC1.5 IC2.1 INPUT.9 J2.1 J3.1 J7.1 O1.K O2.K O3.K O4.K O5.K O6.K O7.K PAD1.1 PAD2.1 PAD3.1 PAD4.1 POWD.K POWER.1 Q3.2 R11.2 R14.1 S1.7 S1.8 S1.9 S1.10 S1.11 S1.12 S2.2 U4.15 U5.5 U34.9 U39.9 USB.4 USB.5 USB.6 | length 127.7
  Top Layer w0.2: R14.1 -57.9,8.2 -57.4,8.2 C19.2 ; J7.1 -58.17,-23.63 -58.17,-29.334 -54.864,-32.64 -53.736,-32.64 C8.2@-52.996,-31.9 ; C8.2 -49.5,-28.6 COM4.1 -48,-27.7 C29.1 D1.A ; COM1.8 -34.021,-30.005 -32.751,-28.735 COM1.2 -27.465,-28.735 -27.3,-28.9 C28.1 ; U4.15 -30.475,9.609 -29.5,8.634 -29.5,7.7 C20.2 ; C25.1 -22.5,13.5 -20.895,15.105 U5.5 -19.345,15.1 -16.6,15.1 -15.6,16.1 -15.6,18.1 -15.9,18.1 C1.2 -18.1,20.32 -18.84,21.06 -18.84,22.364 -16.804,24.4 C2.2 ; S1.7 S1.8 S1.9 S1.10 S1.11 S1.12 2.1,-40.06 2.1,-26.2 0.1,-24.2 I2.K ; C9.2 -7.5,-24.4 I1.K
  Top Layer w0.5: IC2.1 -43.6,4 C6.2 -45.5,4.9 -45.5,9.9 -44.8,10.6 -41.6,10.6 IC1.2@-39.6,10.6
  other v1: -26.6,12 -30.5,13.5 -33.1,23.9
  other v2: -16.7,23.2
INPUT1: INPUT.1 R50.2 | length 15.1
  Top Layer w0.5: R50.2 3.5,-22.1 2.7,-22.9 2.7,-29.2 INPUT.1
INPUT2: INPUT.2 R51.2 | length 14.3
  Top Layer w0.5: R51.2 9,-22.1 10.2,-23.3 10.2,-28.7 11.4,-29.9 INPUT.2
INPUT3: INPUT.3 R52.2 | length 14.1
  Top Layer w0.5: R52.2 14.5,-21.2 16.5,-23.2 INPUT.3
INPUT4: INPUT.4 R53.2 | length 15.9
  Top Layer w0.5: R53.2 20,-21.2 17.7,-23.5 17.7,-28.9 INPUT.4
INPUT5: INPUT.5 R54.2 | length 13.8
  Top Layer w0.5: R54.2 25.5,-28.1 26.7,-29.3 INPUT.5
INPUT6: INPUT.6 R55.2 | length 13.6
  Top Layer w0.5: R55.2 31,-22.2 31.8,-23 INPUT.6
INPUT7: INPUT.7 R56.2 | length 15.2
  Top Layer w0.5: R56.2 36.6,-21.1 39,-23.5 39,-30.7 INPUT.7
INPUT8: INPUT.8 R57.2 | length 15
  Top Layer w0.5: INPUT.8 39.9,-30.7 39.9,-23.5 42,-21.4 R57.2
IO1: IC2.58 R37.1 U17.3 | length 106
  Top Layer w0.2: IC2.58 -17.6,-26 -16.097,-26 -15.297,-26.8 -12.1,-26.8 -4.7,-19.4 -4.7,-11.1 -2.2,-8.6 40.7,-8.6 ; v1(40.7,-5.1) 40.7,-8.6 ; R37.1 v1(41.7,-23.2) ; U17.3 44.74,-6.36 42.5,-8.6 40.7,-8.6
  Bottom Layer w0.2: v1(40.7,-5.1) 41.7,-6.1 v1(41.7,-23.2)
IO2: IC2.57 R36.1 U16.3 | length 102.1
  Top Layer w0.2: IC2.57 -18.5,-23.1 -18.5,-24.534 -17.434,-25.6 -15.931,-25.6 -15.131,-26.4 -12.266,-26.4 -5.1,-19.234 -5.1,-10.934 -2.366,-8.2 35.2,-8.2 ; R36.1 v1(34.2,-23) ; v1(35.2,-5.1) 35.2,-8.2 ; U16.3 39.24,-7.56 38.6,-8.2 35.2,-8.2
  Bottom Layer w0.2: v1(34.2,-23) 35.2,-22 v1(35.2,-5.1)
IO3: IC2.56 R35.1 U15.3 | length 92.6
  Top Layer w0.2: IC2.56 -16.4,-25.2 -15.766,-25.2 -14.966,-26 -12.431,-26 -5.5,-19.069 -5.5,-10.769 -2.531,-7.8 29.7,-7.8 ; R35.1 v1(26.7,-23) ; v1(29.7,-5.1) 29.7,-7.8 ; U15.3 33.74,-6.76 32.7,-7.8 29.7,-7.8
  Bottom Layer w0.2: v1(26.7,-23) 29.7,-20 v1(29.7,-5.1)
IO4: IC2.55 R34.1 U14.3 | length 88.6
  Top Layer w0.2: IC2.55 -16.5,-23.1 -16.5,-24.42 -16.12,-24.8 -15.6,-24.8 -14.8,-25.6 -12.597,-25.6 -5.9,-18.903 -5.9,-10.603 -2.697,-7.4 24.2,-7.4 ; R34.1 v1(19.2,-23.1) ; v1(24.2,-5.1) 24.2,-7.4 ; U14.3 28.24,-6.36 27.2,-7.4 24.2,-7.4
  Bottom Layer w0.2: v1(19.2,-23.1) 24.2,-18.1 v1(24.2,-5.1)
IO5: IC2.54 R33.1 U13.3 | length 79.5
  Top Layer w0.2: IC2.54 -14.4,-25.2 -12.763,-25.2 -6.3,-18.737 -6.3,-10.437 -2.863,-7 18.7,-7 ; R33.1 v1(11.7,-23.1) ; v1(18.7,-5.1) 18.7,-7 ; U13.3 22.74,-6.26 22,-7 18.7,-7
  Bottom Layer w0.2: v1(11.7,-23.1) 18.7,-16.1 v1(18.7,-5.1)
IO6: IC2.53 R32.1 U12.3 | length 75.6
  Top Layer w0.2: IC2.53 -14.5,-23.1 -14.5,-24.5 -14.2,-24.8 -12.928,-24.8 -6.7,-18.572 -6.7,-10.272 -3.028,-6.6 13.2,-6.6 ; R32.1 v1(4.2,-23) ; v1(13.2,-5.1) 13.2,-6.6 ; U12.3 17.24,-6.06 16.7,-6.6 13.2,-6.6
  Bottom Layer w0.2: v1(4.2,-23) 13.2,-14 v1(13.2,-5.1)
IO7: IC2.52 R31.1 U11.3 | length 65.4
  Top Layer w0.2: IC2.52 -7.1,-17.5 -7.1,-10.106 -3.194,-6.2 7.7,-6.2 ; R31.1@-2.9,-25.3 v1(-2.9,-22.2) ; v1(7.7,-5.1) 7.7,-6.2 ; U11.3 11.74,-5.76 11.3,-6.2 7.7,-6.2
  Bottom Layer w0.2: v1(-2.9,-22.2) -2.9,-15.7 v1(7.7,-5.1)
IO8: IC2.51 R30.1 U10.3 | length 56.1
  Top Layer w0.2: IC2.51 -7.5,-15.9 -7.5,-9.94 -3.36,-5.8 2.2,-5.8 ; R30.1 v1(-4.7,-22.2) ; v1(2.2,-5.1) 2.2,-5.8 ; U10.3 6.24,-5.46 5.9,-5.8 2.2,-5.8
  Bottom Layer w0.2: v1(-4.7,-22.2) -4.7,-12 v1(2.2,-5.1)
IO9: IC2.30 R77.1 | length 10.8
  Top Layer w0.2: IC2.30 -6.9,2 R77.1
IO10: IC2.29 R76.1 | length 10.8
  Top Layer w0.2: IC2.29 -6.8,4 R76.1
IO11: IC2.28 R75.1 | length 15.2
  Top Layer w0.2: IC2.28 -14.5,3.1 -14.5,4.534 -13.634,5.4 -7.3,5.4 R75.1
IO12: IC2.27 R74.1 | length 14.3
  Top Layer w0.2: IC2.27 -13.8,5.8 -8.8,5.8 R74.1
IO13: IC2.26 R73.1 | length 19.5
  Top Layer w0.2: IC2.26 -16.5,3.1 -16.5,4.534 -14.834,6.2 -9.003,6.2 -6,9.203 -6,10.5 R73.1
IO14: IC2.25 R72.1 | length 19.4
  Top Layer w0.2: IC2.25 -15,6.6 -9.169,6.6 -6.4,9.369 -6.4,12 R72.1
IO15: IC2.24 R71.1 | length 24.7
  Top Layer w0.2: IC2.24 -18.467,3.133 -18.467,4.567 -16.034,7 -9.334,7 -6.8,9.534 -6.8,13.5 R71.1
IO16: IC2.23 R70.1 | length 24.6
  Top Layer w0.2: IC2.23 -16.2,7.4 -9.5,7.4 -7.2,9.7 -7.2,15 R70.1
NetBATT1_1: BATT1.1 IC2.32 | length 12.8
  Top Layer w0.2: BATT1.1 -18.89,-3.89 -17,-2 -14.6,-2 IC2.32
NetC18_1: C18.1 C19.1 D8.K D9.K PB2.1 | length 31.4
  Top Layer w0.5: C18.1 C19.1 -56.175,12.7 D9.K -58.175,20.235 PB2.1 -48.275,20.085 D8.K
NetC21_1: C21.1 U4.1 | length 3.6
  Top Layer w0.2: U4.1 -29.825,19.575 C21.1
NetC21_2: C21.2 U4.3 | length 7.1
  Top Layer w0.2: U4.3 -31.125,18.925 -31.74,19.54 -31.74,20.864 -31.564,21.04 -29.86,21.04 C21.2
NetC22_1: C22.1 U4.5 | length 3.4
  Top Layer w0.2: C22.1 -32.9,18.9 -32.425,18.425 U4.5
NetC22_2: C22.2 U4.4 | length 5.2
  Top Layer w0.2: C22.2 -32.14,21.04 -32.14,19.374 -31.775,19.009 U4.4
NetC23_1: C23.1 U4.2 | length 3.5
  Top Layer w0.2: C23.1 -30.475,19.775 U4.2
NetC24_1: C24.1 U4.6 | length 4
  Top Layer w0.2: C24.1 -34.8,20.234 -33.075,18.509 U4.6
NetD8_A: D8.A PB2.2 Q3.3 | length 12
  Top Layer w0.5: PB2.2 -50.5,14.69 -50.5,12.675 D8.A -48.275,7.55 Q3.3
NetD10_A: D10.A U10.2 | length 4.2
  Top Layer w0.2: D10.A@6.24,-16.115 U10.2
NetD10_K: D10.K R50.1 | length 4.7
  Top Layer w0.5: R50.1 5.5,-18 6.275,-18.775 D10.K
NetD11_A: D11.A U11.2 | length 4.2
  Top Layer w0.2: D11.A@11.74,-16.115 U11.2
NetD11_K: D11.K R51.1 | length 4.7
  Top Layer w0.5: R51.1 10.9,-18 11.775,-18.875 D11.K
NetD12_A: D12.A U12.2 | length 4.2
  Top Layer w0.2: D12.A@17.24,-16.115 U12.2
NetD12_K: D12.K R52.1 | length 4.8
  Top Layer w0.5: R52.1 16.7,-18 17.275,-18.575 D12.K
NetD13_A: D13.A U13.2 | length 4.2
  Top Layer w0.2: D13.A@22.74,-16.115 U13.2
NetD13_K: D13.K R53.1 | length 4.7
  Top Layer w0.5: R53.1 22,-18 22.775,-18.775 D13.K
NetD14_A: D14.A U14.2 | length 4.2
  Top Layer w0.2: D14.A@28.24,-16.115 U14.2
NetD14_K: D14.K R54.1 | length 4.8
  Top Layer w0.5: R54.1 27.7,-18 28.275,-18.575 D14.K
NetD15_A: D15.A U15.2 | length 4.2
  Top Layer w0.2: D15.A@33.74,-16.115 U15.2
NetD15_K: D15.K R55.1 | length 4.8
  Top Layer w0.5: R55.1 33.1,-18 33.775,-18.675 D15.K
NetD16_A: D16.A U16.2 | length 4.3
  Top Layer w0.2: D16.A@39.24,-16.115 U16.2@39.24,-11.8
NetD16_K: D16.K R56.1 | length 4.6
  Top Layer w0.5: R56.1 38.4,-18 39.275,-18.875 D16.K
NetD17_A: D17.A U17.2 | length 4.3
  Top Layer w0.2: D17.A@44.74,-16.115 U17.2@44.74,-11.8
NetD17_K: D17.K R57.1 | length 4.6
  Top Layer w0.5: R57.1 43.8,-18 44.775,-18.975 D17.K
NetJ9_1: J9.1 R29.2 | length 3.6
  Top Layer w0.2: J9.1 -40.9,-29.6 -40.5,-30 R29.2
NetLED1_A: POWD.A R1.2 | length 5
  Top Layer w0.5: R1.2 POWD.A
NetLED2_A: R38.2 RUND.A | length 5
  Top Layer w0.5: RUND.A -30,26.8 R38.2
NetLED3_A: ERRD.A R39.2 | length 5
  Top Layer w0.5: ERRD.A -22.5,26.8 R39.2
NetLED10_A: I1.A R30.2 | length 2.8
  Top Layer w0.5: I1.A R30.2
NetLED11_A: I2.A R31.2 | length 2.9
  Top Layer w0.5: R31.2@-2.9,-26.8 I2.A
NetLED12_A: I3.A R32.2 | length 3.3
  Top Layer w0.5: R32.2 I3.A
NetLED13_A: I4.A R33.2 | length 3.3
  Top Layer w0.5: R33.2 I4.A
NetLED14_A: I5.A R34.2 | length 3.3
  Top Layer w0.5: R34.2 I5.A
NetLED15_A: I6.A R35.2 | length 3.3
  Top Layer w0.5: R35.2 I6.A
NetLED16_A: I7.A R36.2 | length 3.3
  Top Layer w0.5: R36.2 I7.A
NetLED17_A: I8.A R37.2 | length 3.3
  Top Layer w0.5: R37.2 I8.A
NetLED30_A: O1.A R21.2 | length 3.3
  Top Layer w0.5: R21.2 O1.A
NetLED31_A: O2.A R22.2 | length 3.3
  Top Layer w0.5: R22.2 O2.A
NetLED32_A: O3.A R23.2 | length 3.3
  Top Layer w0.5: R23.2 O3.A
NetLED33_A: O4.A R24.2 | length 3.3
  Top Layer w0.5: R24.2 O4.A
NetLED34_A: O5.A@15,26.8 R25.2 | length 3.3
  Top Layer w0.5: R25.2 O5.A@15,26.8
NetLED35_A: O5.A@7.5,26.8 R26.2 | length 3.3
  Top Layer w0.5: R26.2 O5.A@7.5,26.8
NetLED36_A: O6.A R27.2 | length 2.8
  Top Layer w0.5: R27.2 O6.A
NetLED37_A: O7.A R28.2 | length 2.8
  Top Layer w0.5: O7.A R28.2
NetP1_2: P1.2 R485.1 | length 2.9
  Top Layer w0.2: P1.2 -13.6,27.66 R485.1
NetQ3_1: Q3.1 R2.2 | length 3.7
  Top Layer w0.5: R2.2 -52.5,8.5 Q3.1
NetR3_2: R3.2 U4.12 | length 3.8
  Top Layer w0.2: U4.12 -32.425,10.225 R3.2
NetR4_2: R4.2 U4.11 | length 3.3
  Top Layer w0.2: U4.11 -33.075,8.975 R4.2
NetR5_2: R5.2 U4.10 | length 3.3
  Top Layer w0.2: R5.2 -33.725,8.875 U4.10
NetR6_2: R6.2 U4.9 | length 3.8
  Top Layer w0.2: R6.2 -34.375,10.125 U4.9
NetR7_2: R7.2 U5.1 | length 3.7
  Top Layer w0.2: R7.2@-24.705,8.205 U5.1
NetR8_2: R8.2 U5.2 U5.3 | length 5
  Top Layer w0.2: U5.2 -22.8,11.95 ; R8.2 -22.8,11.95 ; U5.3 -22.8,11.95
NetR9_2: R9.2 U5.4 | length 3.7
  Top Layer w0.2: R9.2@-20.895,8.205 U5.4
NetR10_1: R10.1 R13.1 U5.6 | length 5.7
  Top Layer w0.2: U5.6 -22.165,18.535 -21.9,18.8 R10.1 R13.1
NetR11_1: R11.1 R12.1 U5.7 | length 5.7
  Top Layer w0.2: R11.1 R12.1 -23.8,19 -23.435,18.635 U5.7
NetR21_1: R21.1 U30.3 U34.7 U34.8 | length 23.5
  Top Layer w0.2: R21.1@41.6,25.3 R21.1@41.65,25.25 ; R21.1 44.715,22.285 ; U30.3 44.715,22.285 ; U34.8 U34.7 57.12,21.28 56.115,22.285 44.715,22.285
NetR22_1: R22.1 U31.3 U34.5 U34.6 | length 31
  Top Layer w0.2: R22.1@34.1,25.3 R22.1@34.15,25.25 ; R22.1 36.7,22.8 38.8,22.8 39.24,22.36 U31.3 39.24,17.96 39.8,17.4 45.5,17.4 49.1,21 54,21 54.58,20.42 U34.5 U34.6
NetR23_1: R23.1 U32.3 U34.3 U34.4 | length 35.8
  Top Layer w0.2: R23.1@26.6,25.3 R23.1@26.65,25.25 ; R23.1 29.7,22.3 33.3,22.3 33.74,21.86 U32.3 33.74,17.66 34.4,17 45.666,17 49.266,20.6 51.8,20.6 52.04,20.36 U34.3 U34.4
NetR24_1: R24.1 U33.3 U34.1 U34.2 | length 38.5
  Top Layer w0.2: R24.1 21.3,23.2 26.6,23.2 28.24,21.56 U33.3 28.24,17.36 29,16.6 45.831,16.6 47.931,18.7 U34.1 U34.2
NetR25_1: R25.1 U35.3 U39.7 U39.8 | length 59.2
  Top Layer w0.2: R25.1 14.2,22.8 21.6,22.8 22.74,21.66 U35.3 22.74,17.785 24.325,16.2 45.797,16.2 53.497,8.5 56,8.5 57.12,7.38 U39.7 U39.8
NetR26_1: R26.1 U36.3 U39.5 U39.6 | length 64.2
  Top Layer w0.2: R26.1@4.1,25.3 R26.1@4.15,25.25 ; R26.1 6.2,23.3 10.866,23.3 11.766,22.4 16.9,22.4 17.24,22.06 U36.3 17.24,17.66 17.6,17.3 22.66,17.3 24.16,15.8 45.631,15.8 54.58,6.851 U39.5 U39.6
NetR27_1: R27.1 U37.3 U39.3 U39.4 | length 69.7
  Top Layer w0.2: R27.1 -0.4,22.9 10.7,22.9 11.74,21.86 U37.3 11.74,17.46 12.3,16.9 22.494,16.9 23.994,15.4 45.466,15.4 52.04,8.826 U39.3 U39.4
NetR28_1: R28.1 U38.3 U39.1 U39.2 | length 70.4
  Top Layer w0.2: R28.1 -1.9,22.5 5.7,22.5 6.24,21.96 U38.3 6.24,17.36 7.1,16.5 22.328,16.5 23.828,15 45.3,15 49.5,10.8 U39.1 U39.2
NetR49_1: R49.1 U10.1 U11.1 U12.1 U13.1 U14.1 U15.1 U16.1 U17.1 | length 66.8
  Top Layer w0.5: R49.1 0.75,-9.15 3.7,-9.15 ; U10.1 3.7,-9.15 ; U11.1 9.2,-9.15 ; U12.1 14.7,-9.15 ; U13.1 20.2,-9.15 ; U14.1 25.7,-9.15 ; U15.1 31.2,-9.15 ; U16.1@36.7,-11.8 36.7,-9.15 ; U17.1@42.2,-11.8 42.2,-9.8 41.55,-9.15 36.7,-9.15 ; 3.7,-9.15 9.2,-9.15 ; 9.2,-9.15 14.7,-9.15 ; 14.7,-9.15 20.2,-9.15 ; 20.2,-9.15 25.7,-9.15 ; 25.7,-9.15 31.2,-9.15 ; 31.2,-9.15 36.7,-9.15
NetR70_2: R70.2 U30.2 | length 51.4
  Top Layer w0.2: R70.2 -0.4,16.1 22.163,16.1 23.663,14.6 43.5,14.6 44.715,13.385 U30.2
NetR71_2: R71.2 U31.2 | length 44.9
  Top Layer w0.2: R71.2 -1.166,16.3 -0.566,15.7 21.997,15.7 23.497,14.2 38,14.2 39.24,12.96 U31.2
NetR72_2: R72.2 U32.2 | length 39.5
  Top Layer w0.2: R72.2 -1.166,14.4 -0.266,15.3 21.831,15.3 23.331,13.8 33.1,13.8 33.74,13.16 U32.2
NetR73_2: R73.2 U33.2 | length 34.2
  Top Layer w0.2: R73.2 -0.1,14.9 21.666,14.9 23.166,13.4 27.7,13.4 28.24,12.86 U33.2
NetR74_2: R74.2 U35.2 | length 29.4
  Top Layer w0.2: R74.2 1.4,14.5 21.5,14.5 22.74,13.26 U35.2
NetR75_2: R75.2 U36.2 | length 24.9
  Top Layer w0.2: R75.2 0.7,11.9 0.7,12.5 2.3,14.1 3.4,14.1 16.6,14.1 17.24,13.46 U36.2
NetR76_2: R76.2 U37.2 | length 20.4
  Top Layer w0.2: R76.2 1.1,10.4 1.1,12.334 2.466,13.7 11.1,13.7 11.74,13.06 U37.2
NetR77_2: R77.2 U38.2 | length 16
  Top Layer w0.2: R77.2 1.5,8.9 1.5,12.169 2.631,13.3 5.8,13.3 6.24,12.86 U38.2
NetR89_1: R89.1 U30.4 U31.4 U32.4 U33.4 U35.4 U36.4 U37.4 U38.4 | length 54.9
  Top Layer w0.5: R89.1 0.4,20.1 0.7,19.8 U38.4 ; v1(7.8,19.8) U37.4 ; v1(13.2,19.8) U36.4 ; v1(18.8,19.8) U35.4 ; v1(24.2,19.8) U33.4 ; v1(29.8,19.8) U32.4 ; v1(35.3,19.8) U31.4 ; v1(40.7,19.8) U30.4
  Bottom Layer w0.5: v1(2.2,19.8) v1(7.8,19.8) v1(13.2,19.8) v1(18.8,19.8) v1(24.2,19.8) v1(29.8,19.8) v1(35.3,19.8) v1(40.7,19.8)
NRST: IC2.4 S2.1 | length 39.7
  Top Layer w0.5: S2.1 v1(-47.5,-32.2)
  Bottom Layer w0.5: v1(-47.5,-32.2) -47.5,-5.9 IC2.4
OUTPUT1: OUTPUT.2 U34.11 U34.12 | length 19.4
  Top Layer w0.5: OUTPUT.2 44,30.8 56.6,30.8 57.12,30.28 U34.12 U34.11
OUTPUT2: OUTPUT.3 U34.13 U34.14 | length 21.6
  Top Layer w0.5: OUTPUT.3 39.6,30.1 54.2,30.1 54.58,29.72 U34.14 U34.13
OUTPUT3: OUTPUT.4 U34.15 U34.16 | length 25.8
  Top Layer w0.5: OUTPUT.4 35.9,28.7 47.21,28.7 49.41,26.5 51.7,26.5 52.04,26.84 U34.16 U34.15
OUTPUT4: OUTPUT.5 U34.17 U34.18 | length 28.9
  Top Layer w0.5: OUTPUT.5 28.65,34.75 33.25,34.75 34.4,33.6 34.4,31.2 36.2,29.4 47.5,29.4 48.55,28.35 U34.18 U34.17
OUTPUT5: OUTPUT.6 U39.11 U39.12 | length 48.9
  Top Layer w0.5: v1(57.12,16.78) U39.12 U39.11
  Bottom Layer w0.5: OUTPUT.6 23.6,30.8 48.07,30.8 57.12,21.75 v1(57.12,16.78)
OUTPUT6: OUTPUT.7 U39.13 U39.14 | length 52.3
  Top Layer w0.5: v1(54.58,16.78) U39.14 U39.13
  Bottom Layer w0.5: OUTPUT.7 19.2,30.1 47.78,30.1 54.58,23.3 v1(54.58,16.78)
OUTPUT7: OUTPUT.8 U39.15 U39.16 | length 55.8
  Top Layer w0.5: v1(52.04,16.86) U39.16 U39.15
  Bottom Layer w0.5: OUTPUT.8 14.8,29.4 47.49,29.4 52.04,24.85 v1(52.04,16.86)
OUTPUT8: OUTPUT.9 U39.17 U39.18 | length 59.3
  Top Layer w0.5: v1(49.5,16.8) U39.18 U39.17
  Bottom Layer w0.5: OUTPUT.9 10.4,28.7 47.2,28.7 49.5,26.4 v1(49.5,16.8)
PD10: IC2.13 R8.1 | length 9.3
  Top Layer w0.2: IC2.13 -28.7,4.9 -26.6,4.9 -25.8,5.7 -25.8,7 -25.36,7.44 -23.54,7.44 R8.1
PWM1: IC2.43
PWM2: IC2.46
PWM3: IC2.44
PWM4: IC2.42
RJ45_RX: COM2.2 U4.8 | length 28.2
  Top Layer w0.2: U4.8 -34.375,18.005 -35.94,19.57 -35.94,23.126 -32.9,26.166 -32.9,34.3 -31.8,35.4 -28,35.4 COM2.2
RJ45_TX: COM2.3 U4.7 | length 18.6
  Top Layer w0.2: U4.7 -33.725,17.921 -35.54,19.736 -35.54,22.96 -30.5,28 COM2.3
RS232_RX: J3.2 U4.13 | length 58.8
  Top Layer w0.2: U4.13 v1(-31.775,13.48)
  Bottom Layer w0.2: v1(-31.775,13.48) -31.775,12.891 -38.8,5.866 -38.8,1.1 -27.4,-10.3 -27.4,-17.069 -22.8,-21.669 -22.8,-31 J3.2 ; J3.2@-24.6,-32.9 J3.2@-24.55,-32.85
RS232_TX: J3.3 U4.14 | length 58.3
  Top Layer w0.2: U4.14 v1(-31.125,12.975)
  Bottom Layer w0.2: v1(-31.125,12.975) -38.4,5.7 -38.4,1.266 -27,-10.134 -27,-16.903 -22.4,-21.503 -22.4,-29.9 J3.3 ; J3.3@-19.55,-32.85 J3.3@-19.5,-32.9
RUN_LED: IC2.11 RUND.K | length 25.5
  Top Layer w0.2: IC2.11 -29.9,5.7 -27.9,5.7 -27.3,6.3 -27.3,10.6 -28.5,11.8 -28.5,18.6 -27.9,19.2 -27.9,22.9 -28.7,23.7 RUND.K
RX1: IC2.10 R3.1 | length 6.6
  Top Layer w0.2: IC2.10 -32.5,3.1 -32.5,4.534 -31.834,5.2 -31,5.2 -30.5,5.7 R3.1
RX2: IC2.18 R6.1 | length 15.9
  Top Layer w0.2: R6.1 -34.8,5.4 -34.8,1.503 -34.097,0.8 -26.8,0.8 IC2.18
RX3: IC2.20 R7.1 | length 5.2
  Top Layer w0.2: R7.1 -24.7,3.1 IC2.20
RX4: COM4.2 IC2.80 | length 12
  Top Layer w0.5: COM4.2 -48.34,-24 IC2.80
SPI3_CE: IC2.60 J7.3 | length 41.3
  Top Layer w0.2: v1(-27.7,-19.3) -22.8,-19.3 -20.6,-21.5 -20.6,-23 IC2.60
  Top Layer w0.5: J7.3 -54.557,-22.097 -52.807,-22.097 -52.083,-21.373 -52.083,-20.413 -50.97,-19.3 v1(-34.1,-19.3)
  Bottom Layer w0.2: v1(-34.1,-19.3) v1(-27.7,-19.3)
SPI3_CLK: IC2.73 J7.5 | length 19.3
  Top Layer w0.2: J7.5 -52.047,-22.127 -50.073,-22.127 -48.746,-20.8 -36.8,-20.8 IC2.73
SPI3_CS: IC2.74 J7.4 | length 31.9
  Top Layer w0.2: J7.4 -54.858,-20.86 -52.198,-18.2 -33.4,-18.2 -32.5,-19.1 -32.5,-22.4 -33.3,-23.2 -34.8,-23.2 IC2.74
SPI3_IRQ: IC2.59 J7.8 | length 30.1
  Top Layer w0.2: J7.8 -49.371,-20.86 -48.811,-20.3 v1(-36.3,-20.3) ; v1(-28.7,-20.3) -23.3,-20.3 IC2.59
  Bottom Layer w0.2: v1(-36.3,-20.3) v1(-28.7,-20.3)
SPI3_MISO: IC2.72 J7.7 | length 21.7
  Top Layer w0.2: J7.7 -48.58,-21.2 -39.269,-21.2 -38.8,-21.669 -38.8,-24.5 -38.3,-25 -34.6,-25 IC2.72
SPI3_MOSI: IC2.71 J7.6 | length 23.9
  Top Layer w0.2: J7.6 -53.308,-20.86 -51.148,-18.7 -33.851,-18.7 -33.5,-19.051 -33.5,-21.9 IC2.71
SW1: IC2.63 S1.6 | length 19.5
  Top Layer w0.2: IC2.63 -24.5,-23.1 -24.5,-24.5 -22.4,-26.6 -19.74,-26.6 -14.8,-31.54 -14.8,-32.74 S1.6
SW2: IC2.64 S1.5 | length 23
  Top Layer w0.2: IC2.64 -22.6,-27 -19.906,-27 -15.2,-31.706 -15.2,-35.369 -14.469,-36.1 -11.72,-36.1 S1.5
SW3: IC2.65 S1.4 | length 29.6
  Top Layer w0.2: IC2.65 -26.6,-23 -26.6,-24.4 -23.6,-27.4 -20.071,-27.4 -15.6,-31.871 -15.6,-35.534 -14.634,-36.5 -9.58,-36.5 S1.4
SW4: IC2.66 S1.3 | length 30.8
  Top Layer w0.2: IC2.66 -23.8,-27.8 -20.237,-27.8 -16,-32.037 -16,-35.7 -14.8,-36.9 -7.44,-36.9 S1.3
SW5: IC2.62 S1.2 | length 25.3
  Top Layer w0.2: IC2.62 -21.4,-26.2 -19.574,-26.2 -12.374,-33.4 -3.98,-33.4 S1.2
SW6: IC2.61 S1.1 | length 29.5
  Top Layer w0.2: IC2.61 -22.6,-23 -22.6,-24.4 -21.2,-25.8 -19.409,-25.8 -12.209,-33 -1.84,-33 S1.1
SWDCK: IC2.6 J2.2 | length 53.8
  Bottom Layer w0.2: IC2.6 -26,-9.6 -26,-16.469 -20.8,-21.669 -20.8,-25.666 -19.266,-27.2 -13.866,-27.2 -9.856,-31.21 -5.45,-31.21 J2.2
SWDIO: IC2.5 J2.3 | length 52
  Bottom Layer w0.2: IC2.5 -36.5,2.9 -36.5,1.466 -25.6,-9.434 -25.6,-16.303 -20.4,-21.503 -20.4,-25.5 -19.1,-26.8 -13.7,-26.8 -11.8,-28.7 -8.28,-28.7 J2.3
TX1: IC2.9 R4.1 | length 3.3
  Top Layer w0.2: IC2.9 -32.4,5.2 R4.1
TX2: IC2.17 R5.1 | length 16.1
  Top Layer w0.2: R5.1 -34.3,4.8 -34.4,4.7 -34.4,1.669 -33.931,1.2 -27,1.2 -26.5,1.7 -26.5,3.1 IC2.17
TX3: IC2.19 R9.1 | length 3.8
  Top Layer w0.2: IC2.19 -22.4,5.2 R9.1
TX4: COM4.3 IC2.79 | length 15.3
  Top Layer w0.5: COM4.3 -52.58,-25.7 -51.03,-25.7 -47.33,-22 IC2.79
USB_D+: IC2.8 USB.3 | length 35.2
  Top Layer w0.2: USB.3 -42.295,29.397 -42.295,27.695 -41.965,27.365 -37.965,27.365 -37.6,27 -37.6,17.934 -36,16.334 -36,10.866 -37.7,9.166 -37.7,5.4 -36.5,4.2 -36.5,2.9 IC2.8
USB_D-: IC2.7 USB.2 | length 30
  Top Layer w0.2: USB.2 -38.1,28.3 -37.2,27.4 -37.2,18.1 -35.6,16.5 -35.6,10.7 -37.3,9 -37.3,5.7 IC2.7
VCC: C1.1 C2.1 IC1.6 POWER.2 | length 24
  Top Layer w0.8: C1.1 -17.8,22.1 -15.6,22.1 IC1.6@-13.6,22.1 ; IC1.6@-15.6,20.1 -13.6,20.1 IC1.6@-13.6,22.1 ; POWER.2 -11,26.8 -11,25.1 -11.7,24.4 C2.1 IC1.6@-13.6,22.1
VCOM: OUTPUT.1 U34.10 U39.10 | length 32.6
  Top Layer w0.5: OUTPUT.1 59.2,32.8 60.623,31.377 60.623,28.35 ; U39.10 59.66,15.86 60.623,16.823 60.623,28.35 ; U34.10 60.623,28.35
pads on no net: BATT1.0 COM1.5 IC2.14 IC2.15 IC2.16 IC2.21 IC2.22 IC2.37 IC2.38 IC2.41 IC2.45 IC2.69 IC2.70 IC2.75 IC2.76 IC2.77 IC2.78

## Polygon pours and split planes (outlines as drawn)
GND on Top Layer "Top Overlay-No Net" (hatched 90Degree grid 0.508 track 0.203, pour order 5): -61.1,43.6 61.1,43.6 61.1,-43.7 58.6,-43.7 -61.1,-43.7 -61.1,43.6
GND on Bottom Layer "Top Overlay-No Net" (hatched 90Degree grid 0.508 track 0.203, pour order 7): -61.2,43.6 -61.1,43.5 60.9,43.5 60.9,-43.5 59.5,-43.5 -61.1,-43.5 -61.2,-43.4 -61.2,-42.4 -61.2,43.5 -60.8,43.5

## Keep-outs
Keep-Out Layer:
  the board outline again, w0.254

## Silkscreen, mask and mechanical layers (free items; w line width, h text height)
Top Overlay:
  lines w0.254: -61.2,-35 -50,-35 -50,-43.7 ; -61.2,35 -50,35 -50,43.7 ; 50,-43.7 50,-35 61.2,-35 ; 50,43.7 50,35 61.2,35
  text "PE8" at 5.2,36.2 h1
  text "PE9" at 10.1,36.1 h1
  text "PE10" at 14.6,36.1 h1
  text "PE11" at 20,36.1 h1
  text "PE15" at 40.2,36.1 h1
  text "PE12" at 25,36 h1
  text "PE13" at 29.6,36 h1
  text "PE14" at 34.7,36 h1
  text "PA3" at -26.4,35.9 h1
  text "PB10" at -16.7,35.9 h1
  text "PB11" at -11.8,35.9 h1
  text "PA2" at -31.5,35.8 h1
  text "485B" at -16.8,30.3 h0.8
  text "485A" at -11.7,30.3 h0.8
  text "TX" at -31.4,29.7 h0.8
  text "RX" at -26.1,29.7 h0.8
  text "GND" at -21.4,29.7 h0.8
  text "VCC" at -6.1,29.7 h0.8
  text "GND" at -1,29.7 h0.8
  text "VCOM" at 45.3,29.6 h1
  text "O8" at 5.4,29.5 h1
  text "O7" at 10.6,29.5 h1
  text "O6" at 15.7,29.5 h1
  text "O5" at 20.8,29.5 h1
  text "O4" at 25.9,29.5 h1
  text "O3" at 31,29.5 h1
  text "O2" at 36.3,29.5 h1
  text "01" at 41.7,29.5 h1
  text "八进八出  V1.2" at 11.1,2.1 h5
  text "PC10" at -55.4,-26 h0.6
  text "PC11" at -52.5,-26 h0.6
  text "月无声® YWS®" at 53.1,-28.5 h5 r90
  text "阿波罗工业控制器" at 58.7,-30 h5 r90
  text "3.3V" at -58.9,-30.4 h0.8
  text "TX" at -55.3,-30.4 h0.8
  text "RX" at -52.7,-30.4 h0.8
  text "GND" at -50.2,-30.4 h0.8
  text "TX1" at -20.6,-30.4 h1
  text "RX1" at -24.8,-30.5 h1
  text "I1" at 5.6,-30.5 h1
  text "I2" at 10.8,-30.5 h1
  text "I3" at 15.6,-30.5 h1
  text "I4" at 20.9,-30.5 h1
  text "I5" at 25.9,-30.5 h1
  text "I6" at 31,-30.5 h1
  text "I7" at 36.2,-30.5 h1
  text "I8" at 41.2,-30.5 h1
  text "GND" at 45.7,-30.5 h1
  text "+3.3V" at -10.6,-32.2 h0.6 r330
  text "SWDIO" at -7.9,-32.3 h0.6 r330
  text "SWDCK" at -5.5,-32.3 h0.6 r330
  text "GND" at -2.9,-32.3 h0.8 r330
  text "PA10" at -26.2,-36.9 h1
  text "PA9" at -20.6,-37 h1
  text "PE0" at 40.9,-37 h1
  text "PB8" at -42.7,-37.1 h1
  text "PB9" at -37.5,-37.1 h1
  text "PE7" at 5.2,-37.1 h1
  text "PE6" at 10.2,-37.1 h1
  text "PE5" at 15.3,-37.1 h1
  text "PE4" at 20.5,-37.1 h1
  text "PE3" at 25.5,-37.1 h1
  text "PE2" at 30.7,-37.1 h1
  text "PE1" at 35.8,-37.1 h1
  text "s1" at -14,-37.5 h1
  text "s2" at -11.28,-37.5 h1
  text "s3" at -8.56,-37.5 h1
  text "s4" at -5.84,-37.5 h1
  text "s5" at -3.12,-37.5 h1
  text "s6" at -0.4,-37.5 h1
  text "LO" at -42.5,-40.9 h1
  text "HO" at -36.7,-40.9 h1
Bottom Overlay:
  text "东莞市月无声电子" at -20.9,-37.3 h5
  text "www.yuewusheng.com" at -18.5,-40.8 h4

## Dimensions
-61.2,35 to -61.2,-35 on Top Overlay
-50,43.7 to 50,43.7 on Top Overlay
-61.2,-43.7 to 61.2,-43.7 on Top Overlay
-61.2,43.7 to -61.2,-43.7 on Top Overlay

## Text inside footprints (layer, text, board x,y; h text height)
BATT1: Top Overlay "+" at -16.99,-12.507 h3 r180
USB: Top Overlay "4" at -45.17,30.332 h1.27 r90; Top Overlay "1" at -45.17,27.792 h1.27 r90